# Altium PCB KNOCKLET_BRAC.PcbDoc
Units mm, origin at the board's own origin, x right, y up, seen from the top; angles counter-clockwise.
Board outline 80 x 80 mm, 4 copper layers (Top Layer, Internal Plane 1, Internal Plane 2, Bottom Layer), stack 0.462 mm thick; 43 components, 56 nets, 195 pads, 16 vias.
Unrouted connection lines stored in the file: 35.
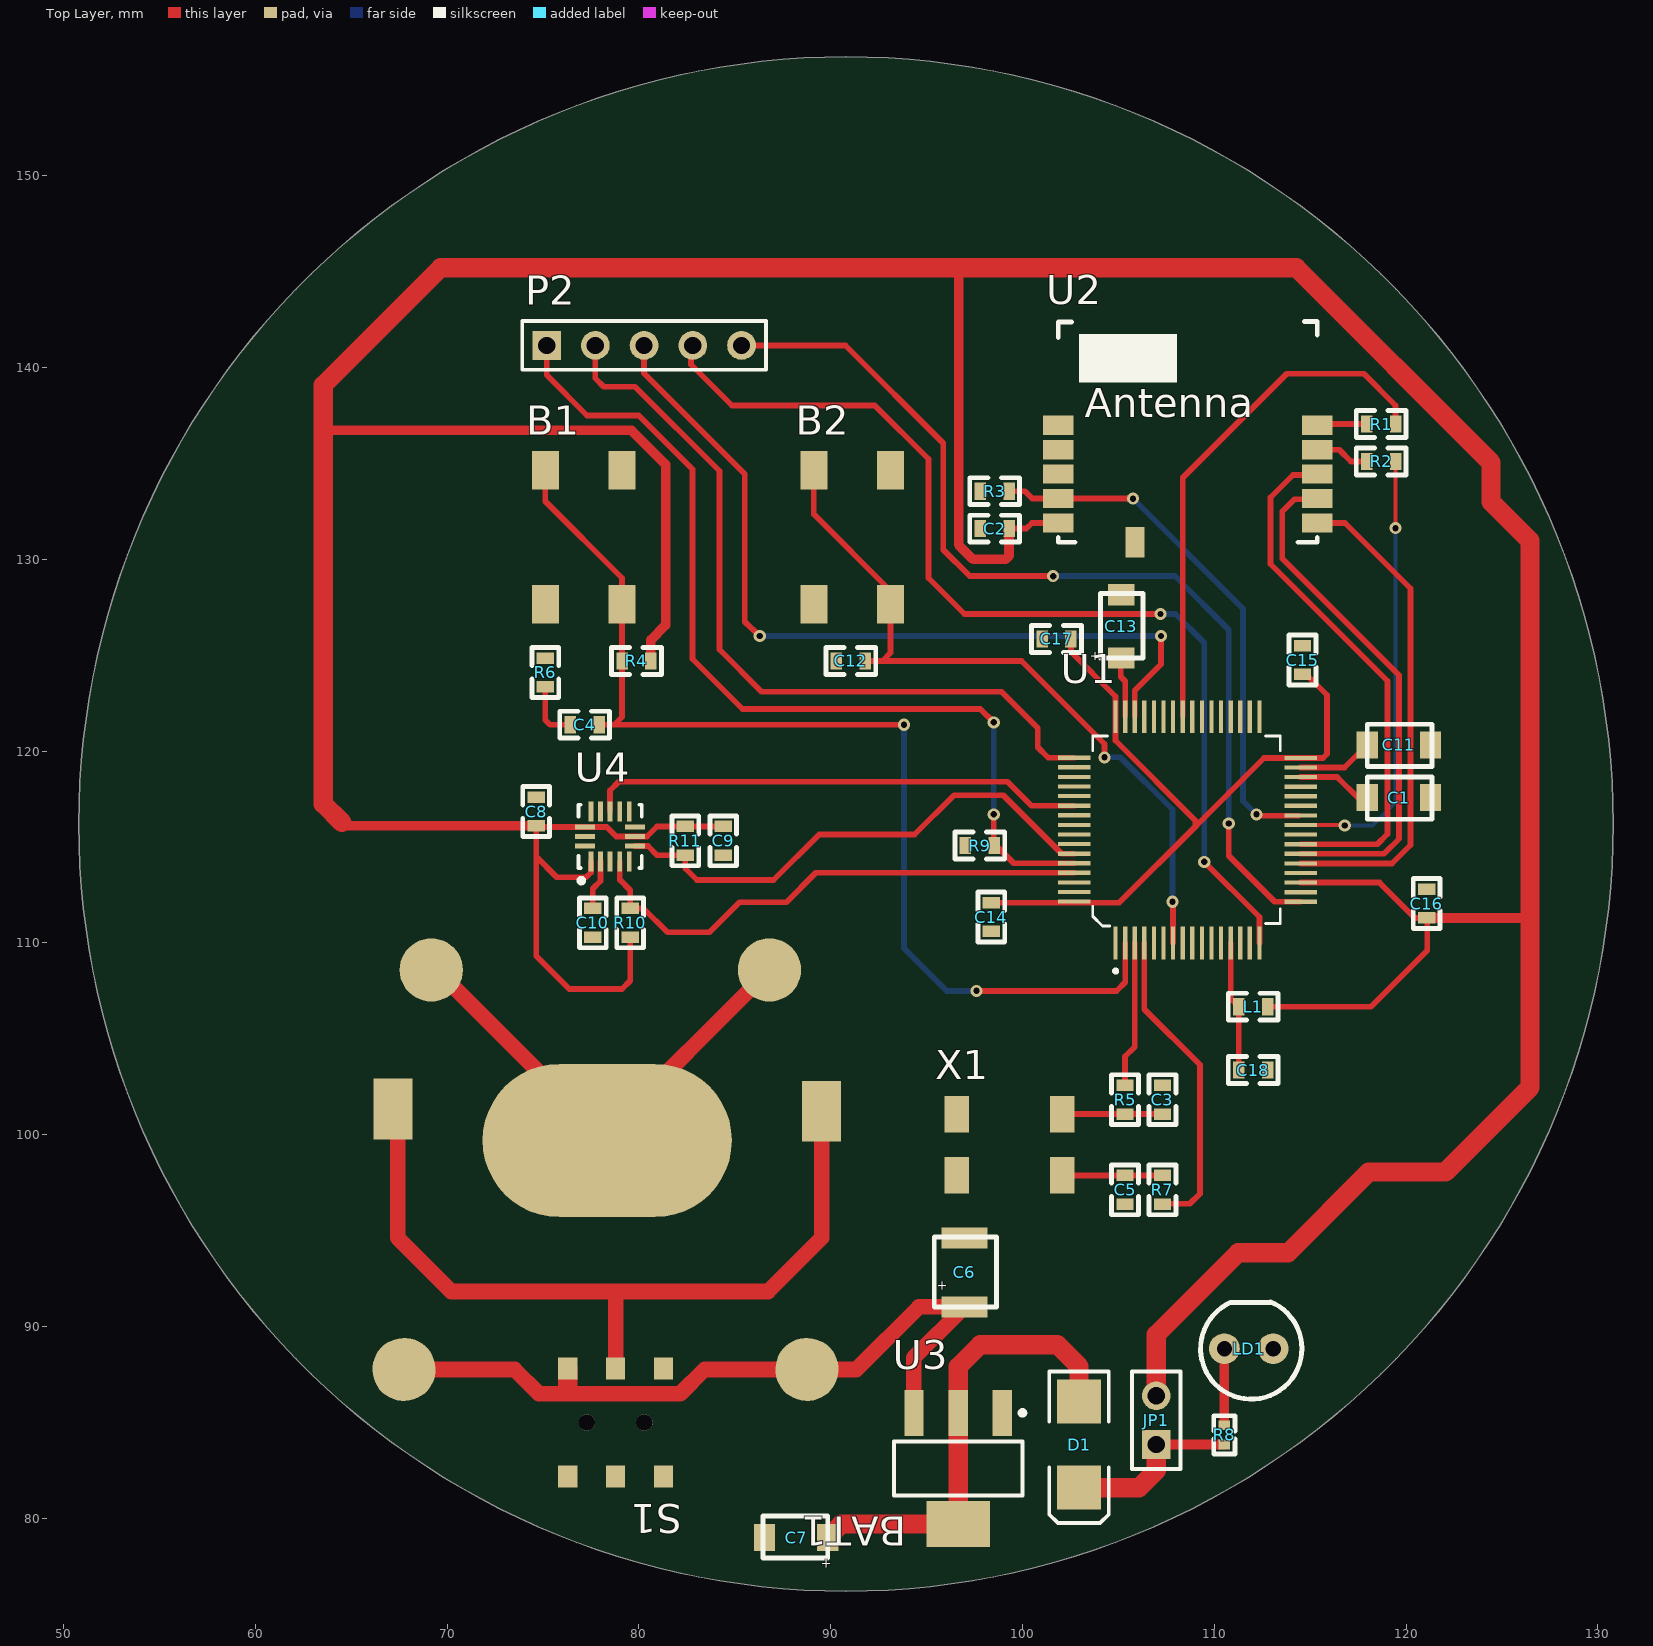
[diagram p0: Top Layer view]
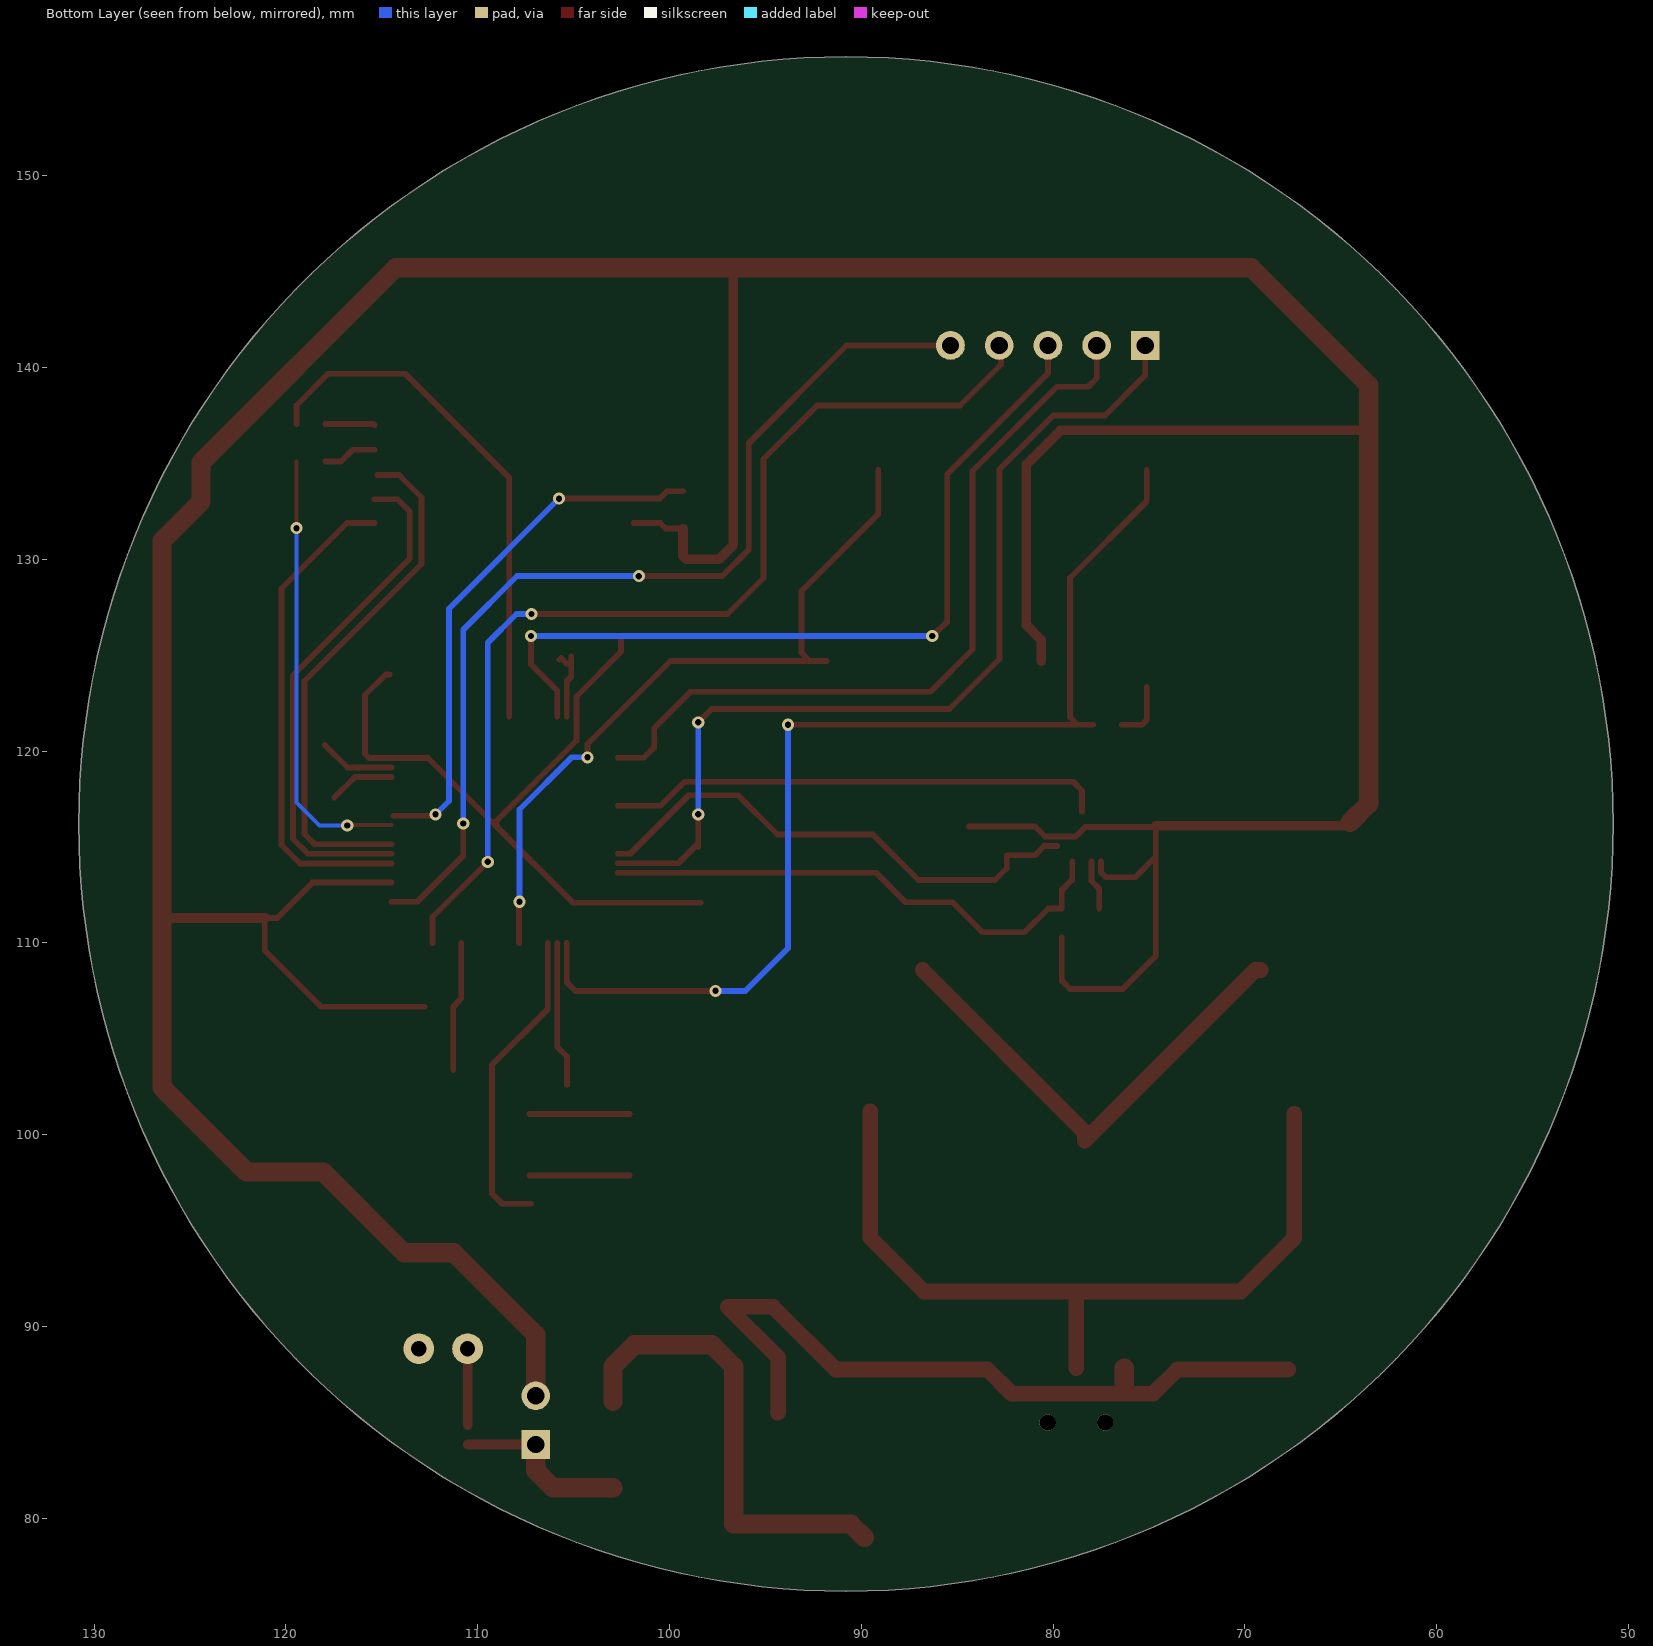
[diagram p1: Bottom Layer view, seen from below]
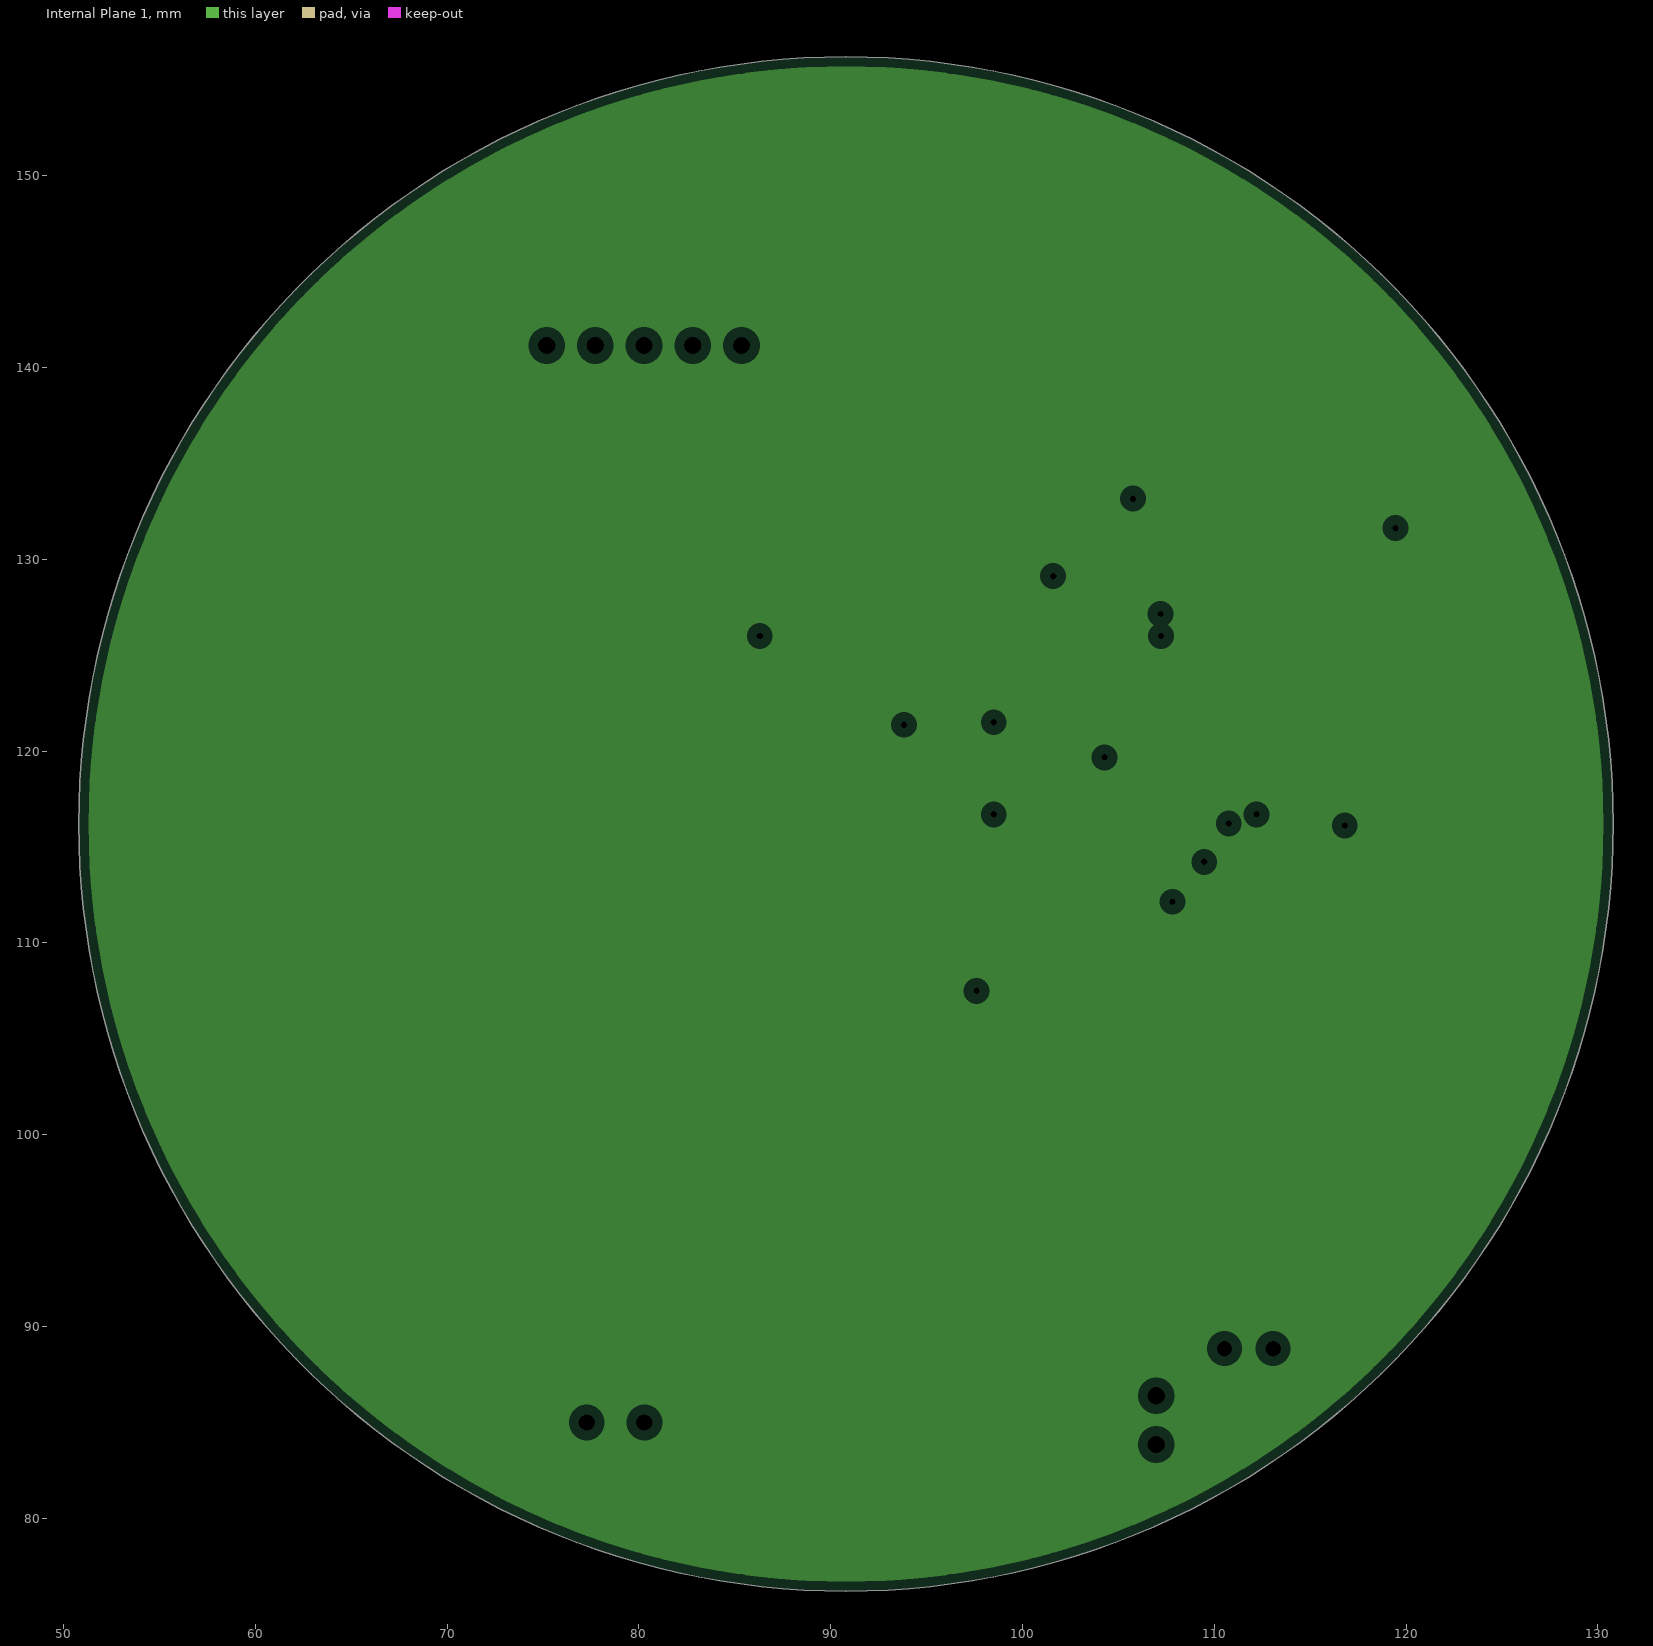
[diagram p2: Internal Plane 1, clearances drawn from the general rule]
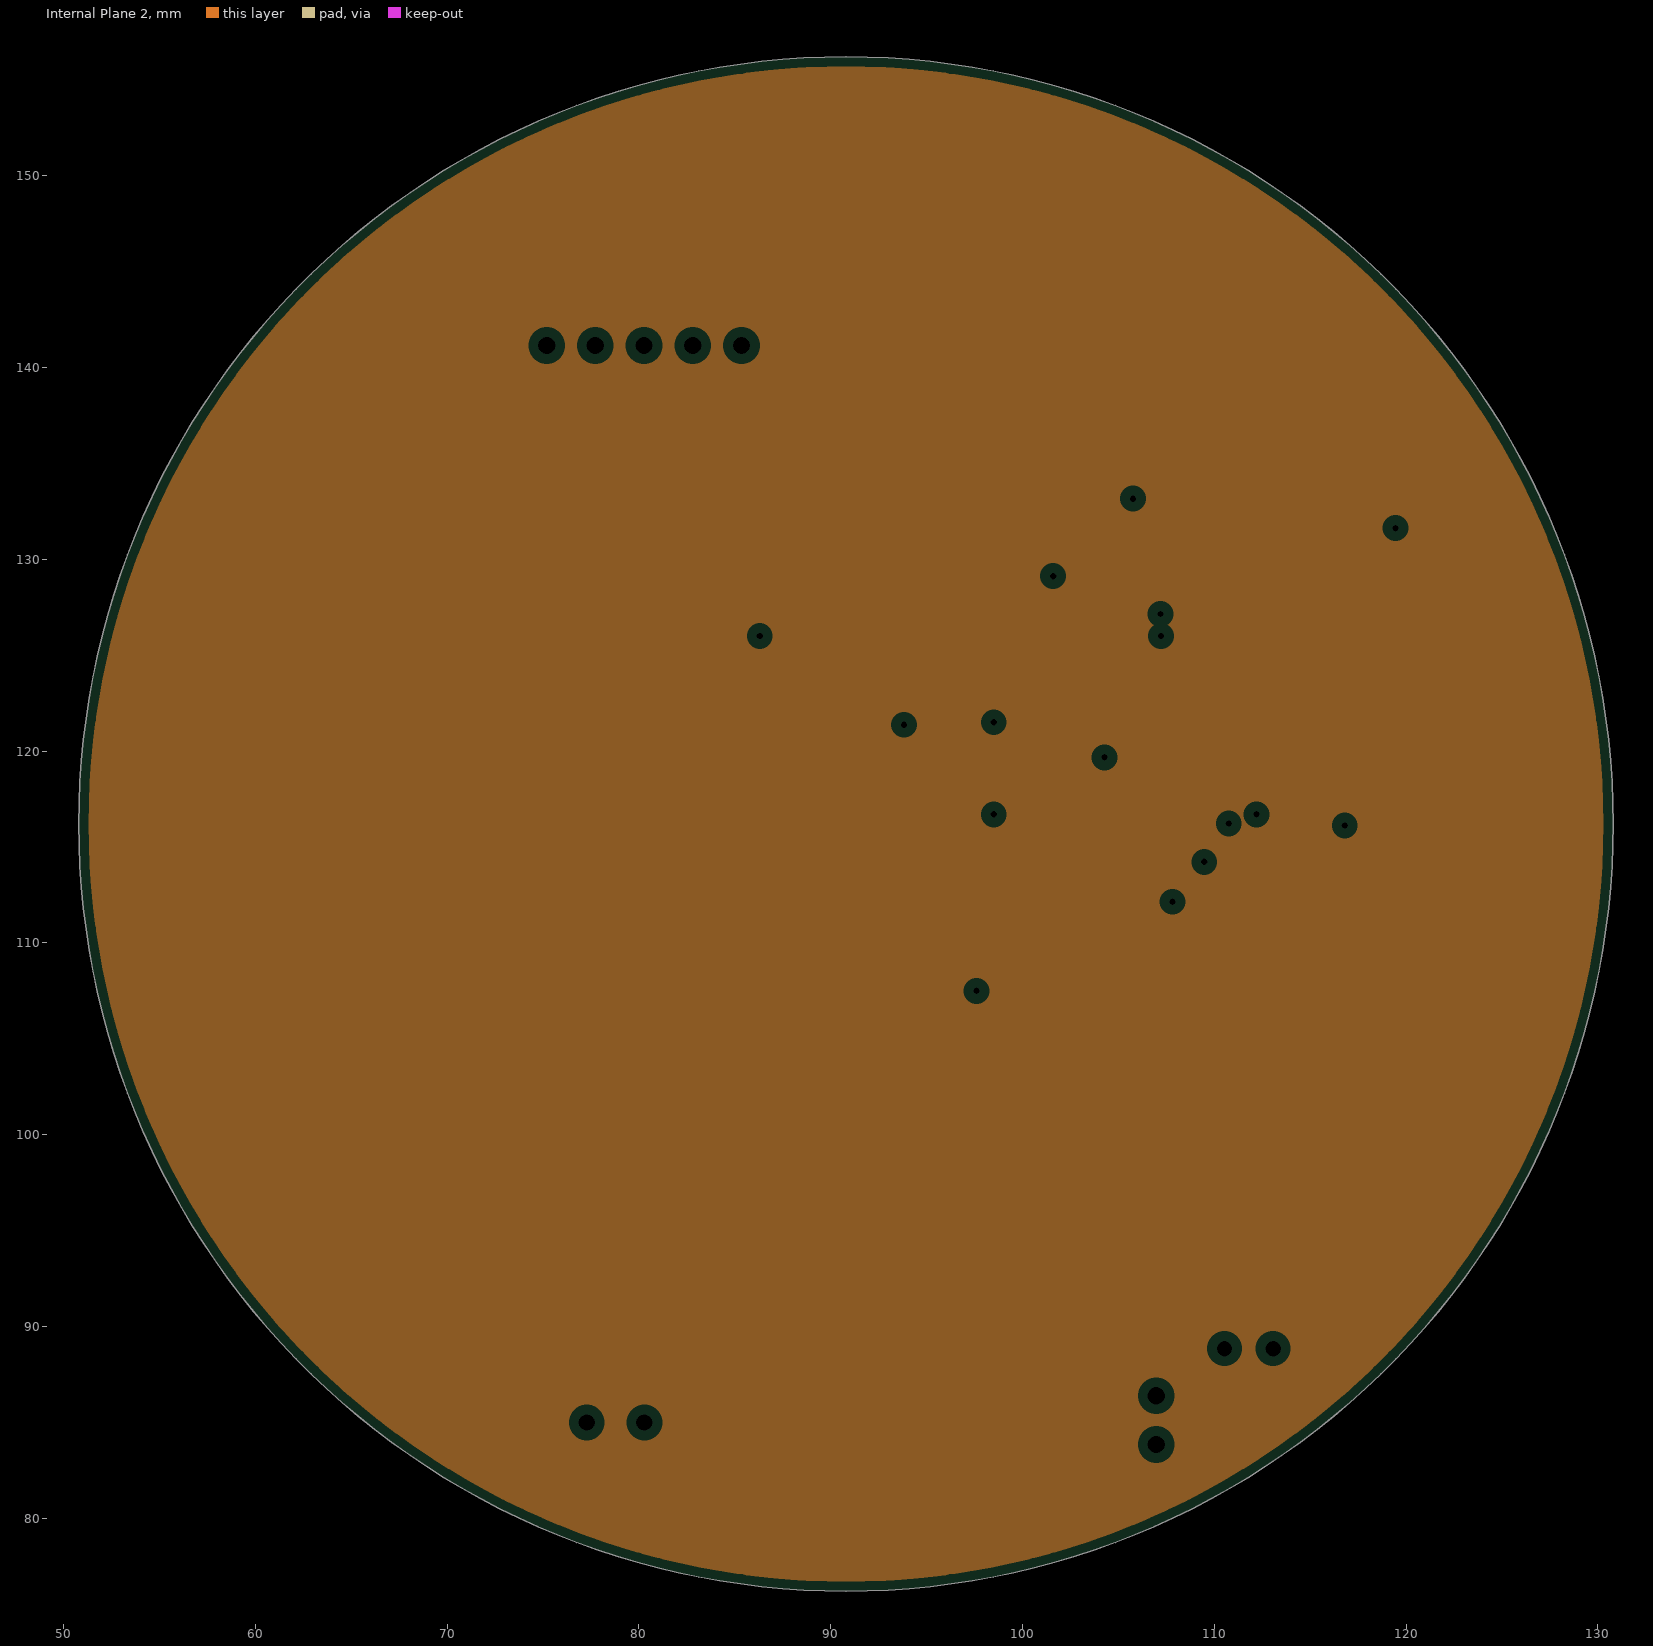
[diagram p3: Internal Plane 2, clearances drawn from the general rule]
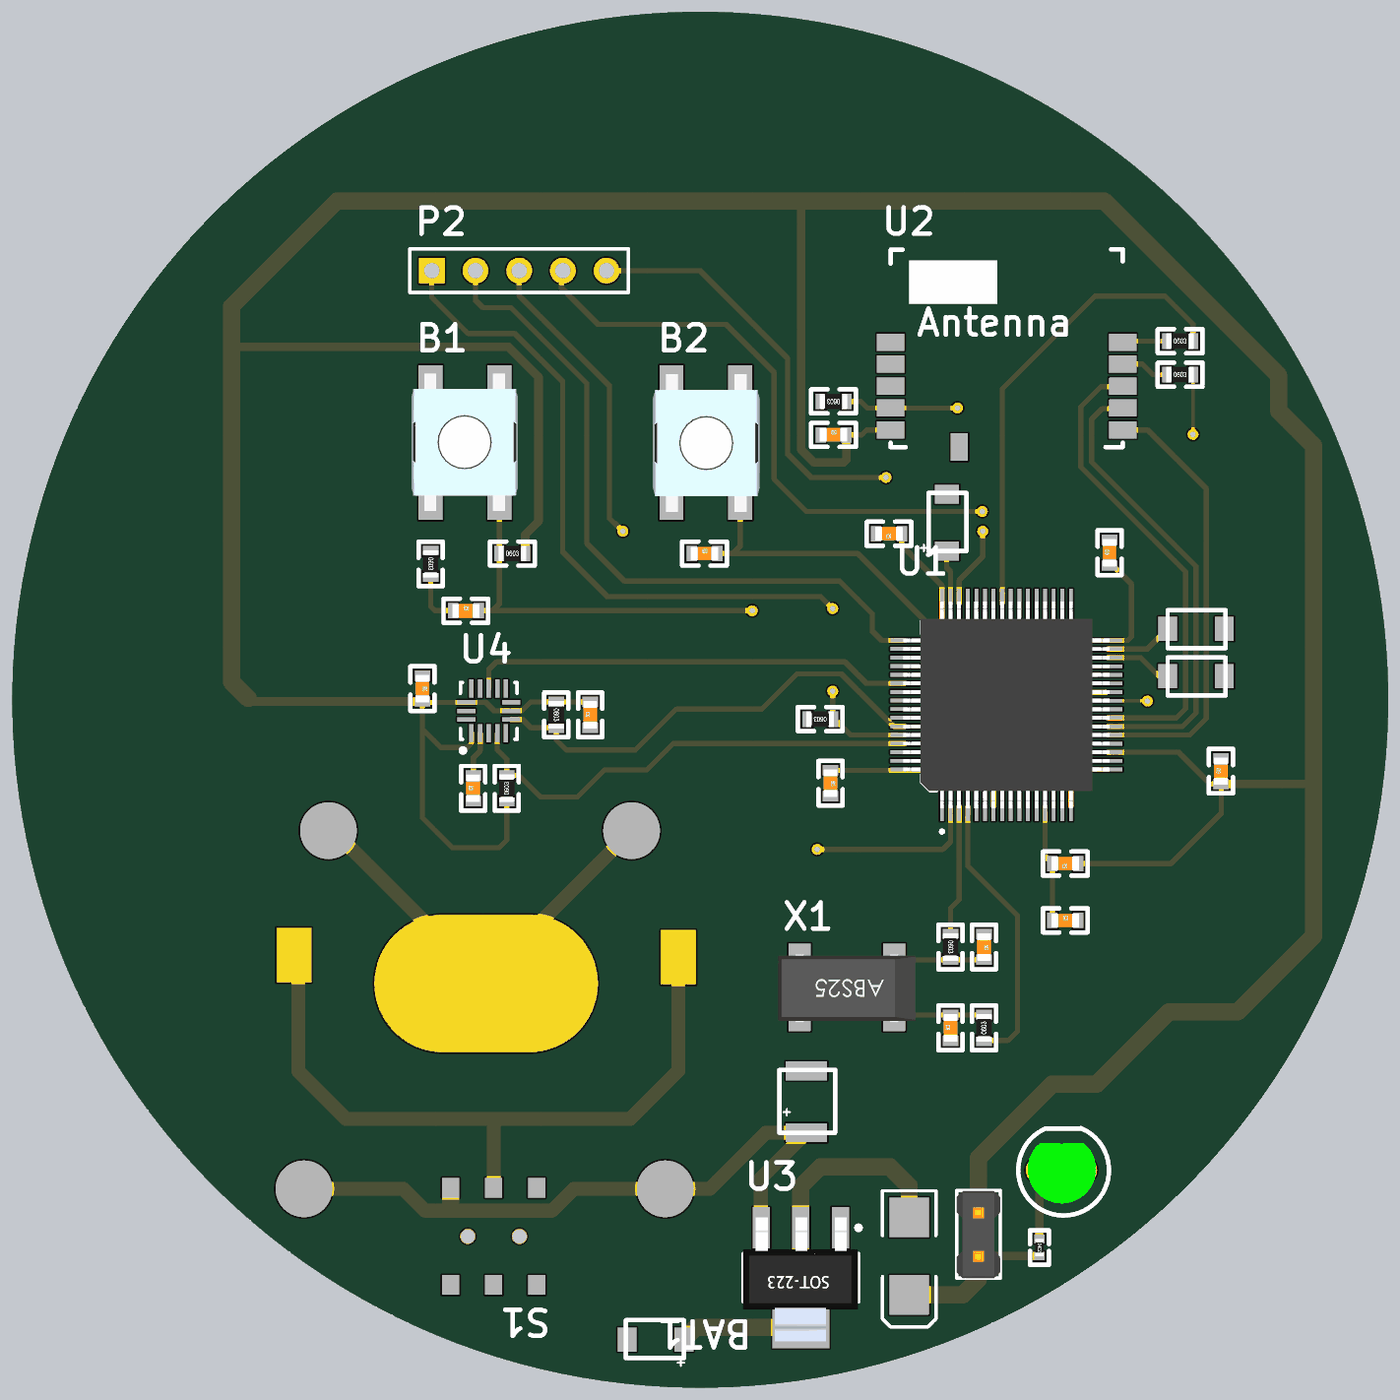
[diagram p4: 3D render of the assembled board from above, using the file's embedded part models]

## Layer stack, top to bottom
Top Solder: solder mask 0.0102, Solder Resist, Dk 3.5
Top Layer: signal copper 0.0356
Internal Plane 1: plane copper 0.0356
Internal Plane 2: plane copper 0.0356
Dielectric 1: dielectric 0.32, FR-4, Dk 4.8
Bottom Layer: signal copper 0.0356
Bottom Solder: solder mask 0.0102, Solder Resist, Dk 3.5

## Board outline
130.8,116.2 ccw(c90.8,116.2) 90.8,156.2 ccw(c90.8,116.2) 50.8,116.2 ccw(c90.8,116.2) 90.8,76.2 ccw(c90.8,116.2)

## Design rules (kind name [scope] priority, off if disabled: settings)
Clearance [All] p1: gap=0.3 ignorepadtopadclearanceinfootprint=FALSE
PlaneClearance [All] p1: clearance=0.508
PlaneConnect [All] p1: planeconnectstyle=Relief reliefexpansion=0.508 reliefentries=4 reliefconductorwidth=0.254 reliefairgap=0.254
PolygonConnect [All] p1: connectstyle=Relief reliefconductorwidth=0.254 reliefentries=4 polygonreliefangle="90 Angle" airgapwidth=0.254
RoutingVias [All] p1: holewidth=0.33 width=0.635 viastyle="Through Hole" minholewidth=0.203 minwidth=0.406 maxholewidth=0.711 maxwidth=1.27
SolderMaskExpansion [All] p1: expansion=0.102
UnRoutedNet [All] p1: checkbadconnections=TRUE
Width [All] p1: maxlimit=2.54 minlimit=0.2 preferedwidth=0.3 minimp=50.000000 maximp=50.000000 favimp=50.000000
27 further rules are at their usual default settings.

## Components (designator, comment, footprint, x,y, rotation, side; value= is the part's Value field where it differs from the comment)
B1 "USER (Blue)" SW_Wurth_430481035816 79.125,134.65 r270 top
B2 "TD-0341 [RESET/Black]" SW_Wurth_430481035816 89.125,127.65 r90 top
BAT1 "20mm coincell" BATT 78.35,99.7 r180 top
C1 "4.7uF" TAN-A 118.575,117.55 r0 top value=2.2uF
C2 "Cap" 0603[IMP]-CAP 97.8,131.6 r0 top value=1uF
C3 "Cap" 0603[IMP]-CAP 107.3,102.575 r270 top value=4.3pF
C4 "Cap" 0603[IMP]-CAP 76.425,121.375 r0 top value=100nF
C5 "Cap" 0603[IMP]-CAP 105.35,96.375 r90 top value=4.3pF
C6 "10uF(25V)" TAN-B 97,92.9 r90 top value=10uF
C7 "10uF" TAN-A 89.25,79.025 r180 top
C8 "Cap" 0603[IMP]-CAP 74.65,117.6 r270 top value=4.7uF
C9 "Cap" 0603[IMP]-CAP 84.4,114.575 r90 top value=0.1uF
C10 "Cap" 0603[IMP]-CAP 77.6,110.3 r90 top value=0.1uF
C11 "2.2uF" TAN-A 118.575,120.3 r0 top
C12 "Cap" 0603[IMP]-CAP 90.3,124.7 r0 top value=100nF
C13 "2.2uF" TAN-A 105.175,125.45 r90 top
C14 "Cap" 0603[IMP]-CAP 98.375,112.1 r270 top value=100nF
C15 "Cap" 0603[IMP]-CAP 114.6,124 r90 top value=100nF
C16 "Cap" 0603[IMP]-CAP 121.075,111.3 r90 top value=100nF
C17 "Cap" 0603[IMP]-CAP 102.525,125.85 r180 top value=100nF
C18 "Cap" 0603[IMP]-CAP 111.277,103.372 r0 top value=100nF
D1 "" SMB 102.95,83.85 r270 top
JP1 "" HDR1X2 106.975,83.85 r90 top
L1 "" 0603[IMP]-CAP 112.777,106.674 r180 top value=10mH
LD1 "Green" LED-1 111.8,88.85 r270 top
P2 "Header 5" HDR1X5 75.193,141.15 r0 top
R1 "Res1" 0603[IMP]-RES 117.95,137.05 r0 top value=10K
R2 "Res1" 0603[IMP]-RES 117.95,135.1 r0 top value=10K
R3 "Res1" 0603[IMP]-RES 99.3,133.55 r180 top value=47K
R4 "Res1" 0603[IMP]-RES 79.125,124.7 r0 top value=4K7
R5 "Res1" 0603[IMP]-RES 105.35,102.575 r270 top value=0
R6 "Res1" 0603[IMP]-RES 75.125,124.85 r270 top value=100
R7 "Res1" 0603[IMP]-RES 107.3,96.375 r90 top value=0
R8 "1K" 0402[IMP]-RES 110.525,84.85 r270 top
R9 "Res1" 0603[IMP]-RES 98.525,115.075 r180 top value=10K
R10 "Res1" 0603[IMP]-RES 79.55,110.3 r90 top value=10K
R11 "Res1" 0603[IMP]-RES 82.425,116.075 r270 top value=10K
S1 "SWITCH-SPDTSMD" AYZ0202 78.8,85 r180 top locked
U1 "MCU_LQFP64" LQFP64 108.6,115.9 r90 top
U2 "SPBTLE-RF" SPBTLE-RF 127.718,139.44 r0 top
U3 "LD1117S50TR" SOT223_N 96.65,82.598 r270 top
U4 "MMA8452QT" MMA8452QT 78.5,115.55 r90 top
X1 "32.768K[N/A]" Quartz_ABS25 102.076,97.879 r180 top

## Footprints (in the part's own frame and the unit in brackets; to place one, negate y for a bottom-side part, rotate by r counter-clockwise, add the part's x,y. Pads: shape width x height; smd on the part's side, far side on the other; paste and mask are expansions set on the pad)
0402[IMP]-RES [mm] "Chip Resistor, Body 2.0x1.2mm, IPC Medium Density"
  rect 0.5x0.6 smd: 1(0,0) 2(1,0)
  silkscreen extent -0.5,-0.55 1.5,0.55, body extent 0,-0.25 1,0.25, height 0.35
0603[IMP]-CAP [mm] "Chip Resistor, Body 2.0x1.2mm, IPC Medium Density"
  rect 0.6x0.9 smd: 1(0,0) 2(1.5,0)
  silkscreen extent -0.55,-0.7 2.05,0.7, body extent -0.05,-0.4 1.55,0.4, height 0.3
0603[IMP]-RES [mm] "Chip Resistor, Body 2.0x1.2mm, IPC Medium Density"
  rect 0.6x0.9 smd: 1(0,0) 2(1.5,0)
  silkscreen extent -0.55,-0.7 2.05,0.7, body extent -0.05,-0.45 1.55,0.45, height 0.5
AYZ0202 [mm]
  round 0.85 hole 0.85: 0(-1.489,0.002) 0(1.511,0.002)
  rect 1x1.15 smd: 1(2.511,-2.823) 2(0.011,-2.823) 3(-2.489,-2.823) 4(2.511,2.827) 5(0.011,2.827) 6(-2.489,2.827)
BATT [mil]
  round 129.91 smd: 1(-333,-350) 1(361,-350) 2(-410,470) 2(417,470)
  rrect100% 511.81x314.96 smd paste-255.91: 1(0,0)
  rect 80x125 smd paste-62.5: 2(-440,-60) 2(440,-65)
  Top Layer lines w10: 440,60 430,60
  Top Layer lines w32: 430,60 430,200 320,310 0,310 -17.28,310 -330,310 -440,200 ; 417,470 190,470 140,520 100,520 -150,520 -200,470 -410,470 ; 361,-350 350,-350 0,0 0,-17 -333,-350
  Top Layer lines w32.01: 430,60 430,-55 ; -440,200 -440,65 -440,-60
  body extent -583,-420 600,386, height 39
HDR1X2 [mm] "Connector; Header; 2 Position"
  rect 1.5x1.5 hole 0.9: 1(0,0)
  round 1.5 hole 0.9: 2(2.54,0)
  round 1.5 on Top Paste: 2(2.54,0)
  round 1.5 on Bottom Paste: 2(2.54,0)
  silkscreen extent -1.27,-1.27 3.81,1.27, body extent -1.29,-1.27 3.79,1.27, height 9.5
HDR1X5 [mm] "Connector; Header; 5 Position"
  rect 1.5x1.5 hole 0.9: 1(0,0)
  round 1.5 hole 0.9: 2(2.54,0) 3(5.08,0) 4(7.62,0) 5(10.16,0)
  silkscreen extent -1.27,-1.27 11.43,1.27
LED-1 [mm] "LED; 2 Leads"
  round 1.6 hole 0.8: 1(0,-1.27) 2(0,1.27)
  silkscreen extent -2.44,-2.51 2.64,2.77, body extent -1.55,-1.97 1.94,2.02, height 5.38
LQFP64 [mm]
  rect 1.7x0.22 smd: 1(-5.901,3.747) 2(-5.901,3.247) 3(-5.901,2.747) 4(-5.901,2.247) 5(-5.901,1.747) 6(-5.901,1.247) 7(-5.901,0.747) 8(-5.901,0.247) 9(-5.901,-0.253) 10(-5.901,-0.753) 11(-5.901,-1.253) 12(-5.901,-1.753) 13(-5.901,-2.253) 14(-5.901,-2.753) 15(-5.901,-3.253) 16(-5.901,-3.753) 33(5.902,-3.753) 34(5.902,-3.253) 35(5.902,-2.753) 36(5.902,-2.253) 37(5.902,-1.753) 38(5.902,-1.253) 39(5.902,-0.753) 40(5.902,-0.253) 41(5.902,0.247) 42(5.902,0.747) 43(5.902,1.247) 44(5.902,1.747) 45(5.902,2.247) 46(5.902,2.747) 47(5.902,3.247) 48(5.902,3.747)
  rect 0.22x1.7 smd: 17(-3.753,-5.901) 18(-3.253,-5.901) 19(-2.753,-5.901) 20(-2.253,-5.901) 21(-1.753,-5.901) 22(-1.253,-5.901) 23(-0.753,-5.901) 24(-0.253,-5.901) 25(0.247,-5.901) 26(0.747,-5.901) 27(1.247,-5.901) 28(1.747,-5.901) 29(2.247,-5.901) 30(2.747,-5.901) 31(3.247,-5.901) 32(3.747,-5.901) 49(3.754,5.902) 50(3.254,5.902) 51(2.754,5.902) 52(2.254,5.902) 53(1.754,5.902) 54(1.254,5.902) 55(0.754,5.902) 56(0.254,5.902) 57(-0.246,5.902) 58(-0.746,5.902) 59(-1.246,5.902) 60(-1.746,5.902) 61(-2.246,5.902) 62(-2.746,5.902) 63(-3.246,5.902) 64(-3.746,5.902)
  silkscreen extent -7.42,-4.84 4.89,4.94, body extent -6,-6 6,6, height 1.56
MMA8452QT [mm] "QFN, 16-Leads, Body 3,00x3,00mm, Pitch 0,50mm, Thermal Pad 0,00x1,15mm, IPC Medium Density"
  rect 1.05x0.25 smd: 1(-1.3,1) 2(-1.3,0.5) 3(-1.3,0) 4(-1.3,-0.5) 5(-1.3,-1) 9(1.3,-1) 10(1.3,-0.5) 11(1.3,0) 12(1.3,0.5) 13(1.3,1)
  rect 0.25x1.05 smd: 6(-0.5,-1.3) 7(0,-1.3) 8(0.5,-1.3) 14(0.5,1.3) 15(0,1.3) 16(-0.5,1.3)
  silkscreen extent -2.42,-1.65 1.65,1.65, body extent -1.5,-1.5 1.5,1.5, height 1
Quartz_ABS25 [mm]
  rect 1.3x1.9 smd: 1(0,-3.2) 2(5.5,-3.2) 3(5.5,0) 4(0,0)
  body extent -1.25,-3.55 6.75,0.45, height 2.7
SMB [mm] "DO-214-AA/SMB; 2 C-Bend Leads; Body 5.3 x 3.6 mm, inc. leads (LxW)"
  rect 2.3x2.3 smd: 1(-2.25,0) 2(2.25,0)
  silkscreen extent -3.8,-1.55 4.1,1.55
SOT223_N [mm] "SOT223, 4-Leads, Body 6.5x3.5mm, Pitch 2.3mm, Lead Span 7mm, IPC Medium Density"
  rect 2.4x1 smd: 1(-2.9,2.3) 2(-2.9,0) 3(-2.9,-2.3)
  rect 2.4x3.3 smd: 4(2.9,0)
  silkscreen extent -3.02,-3.35 1.4,3.48, body extent -3.5,-3.37 3.7,3.33, height 1.85
SPBTLE-RF [mm] "Module BlueNRG"
  rect 1.6x1 smd: 1(-25.85,-2.45) 2(-25.85,-3.725) 3(-25.85,-5) 4(-25.85,-6.275) 5(-25.85,-7.55) 7(-12.35,-7.55) 8(-12.35,-6.275) 9(-12.35,-5) 10(-12.35,-3.725) 11(-12.35,-2.45)
  rect 1x1.6 smd: 6(-21.85,-8.55)
  silkscreen extent -25.85,-8.55 -12.35,2.95
SW_Wurth_430481035816 [mm]
  rect 2x1.4 smd: 1(0,0) 2(7,0) 3(0,-4) 4(7,-4)
  body extent -0.53,-5.12 7.47,1.07, height 3.5
TAN-A [mm]
  rect 1.1x1.4 smd: 1(-0.6,0.025) 2(2.7,0.025)
  silkscreen extent -0.6,-1.1 2.77,1.1
TAN-B [mm]
  rect 1.1x2.4 smd: 1(-1.875,0.025) 2(1.725,0.025)
  silkscreen extent -1.87,-1.65 1.77,1.6

## Part data
B1 B2: library part "SW PUSHBUTTON", "SE PUSHBUTTON"
BAT1: library part BATTERY20MM_4LEGS, "Battery Holders Various common sizes : AA, AAA, 18650 (PRT-12895), 20mm coin cell and 12mm coin cell. 20MM_4LEGS, BATT-10373", PROD_ID=BATT-10373
C1: library part Cap_2.2uF_X7R_10%_0805, "Capacitor,4.7uF,25V, X7R,10%,1206,YAGEO", Manuf_1=YAGEO, Manuf_Part_1=CC0805KKX7R7BB225, Order=CC0805KKX7R7BB225, Revision="July-2002: Re-released for DXP Platform."
C2 C3 C4 C5 C8 C9 C10 C12 C14 C15 C16 C17 C18: "Capacitor"
C6 C7: library part "Cap Pol1", "Polarized Capacitor (Radial)", Published=8-Jun-2000, Publisher="Altium Limited", Revision="July-2002: Re-released for DXP Platform."
C11 C13: library part Cap_2.2uF_X7R_10%_0805, "Capacitor,2.2uF,16V, X7R,10%,0805,YAGEO", Manuf_1=YAGEO, Manuf_Part_1=CC0805KKX7R7BB225, Order=CC0805KKX7R7BB225, Revision="July-2002: Re-released for DXP Platform."
D1: library part "D Schottky", "Schottky Diode", Code_JEDEC=DO-214-AA, LatestRevisionDate=17-Jul-2002, LatestRevisionNote="Re-released for DXP Platform.", PackageDescription="DO-214-AA/SMB; 2 C-Bend Leads; Body 5.3 x 3.6 mm, inc. leads (LxW)", PackageReference=SMB, Published=8-Jun-2000, Publisher="Altium Limited"
JP1: library part JP2
L1: library part Inductor, "Inductor", Code_IEC=1005, Code_JEITA=0402, LatestRevisionDate=29-May-2009, LatestRevisionNote="IPC-7351 Footprint Added.", PackageDescription="Chip Inductor", PackageReference=0402-A, Published=8-Jun-2000, Publisher="Altium Limited"
LD1: library part LED2, "Typical RED, GREEN, YELLOW, AMBER GaAs LED", Published=8-Jun-2000, Publisher="Altium Limited", Revision="July-2002: Re-released for DXP Platform."
P2: "Header, 5-Pin", LatestRevisionDate=17-Jul-2002, LatestRevisionNote="Re-released for DXP Platform.", Publisher="Altium Limited"
R1 R2 R3 R4 R5 R6 R7 R9 R10 R11: "Resistor", LatestRevisionDate=17-Jul-2002, LatestRevisionNote="Re-released for DXP Platform.", PackageDescription="Axial Device, Thru-Hole; 2 Leads; 0.3 in Pin Spacing", PackageReference=AXIAL-0.3, Published=8-Jun-2000, Publisher="Altium Limited"
R8: library part Res1, "Resistor", LatestRevisionDate=17-Jul-2002, LatestRevisionNote="Re-released for DXP Platform.", PackageDescription="Axial Device, Thru-Hole; 2 Leads; 0.3 in Pin Spacing", PackageReference=AXIAL-0.3, Published=8-Jun-2000, Publisher="Altium Limited"
S1: "SPDT Switch Simple slide switch, Spark Fun Electronics SKU : COM-00102 DPDT SMT slide switch, AYZ0202, SWCH-08179", PROD_ID=SWCH-08179, SF_ID=COM-00597
U2: "Module BlueNRG"
U3: library part LD1117
X1: library part MC306

## Via types
v1: diameter 0.635, hole 0.33, Top Layer to Bottom Layer, 16 vias

## Nets (pads, with @x,y where several pads share a name; then routed paths per layer and width w, separated by ;. In a path a pad name is that pad's centre, name@x,y a point inside that pad or via, vN(x,y) a via of type N, cw(c..) or ccw(c..) an arc to the next point about the centre after c; other vN are vias at no path point)
+3V3: D1.2 JP1.1 R8.2 | length 9.3
  Top Layer w0.5: JP1.1 R8.2
  Top Layer w1: D1.2 106.075,81.6 106.975,82.5 JP1.1
AVDD: C18.1 L1.2 U1.13 | length 6.8
  Top Layer w0.3: U1.13 110.853,107.098 L1.2 C18.1
BOOT0: P2.1 R9.1 U1.60 | length 49.2
  Top Layer w0.3: P2.1 75.193,139.607 77.3,137.5 80,137.5 82.8,134.7 82.8,124.8 85.4,122.2 97.8,122.2 v1(98.5,121.5) ; R9.1@98.5,115 v1(98.5,116.7) ; R9.1@98.525,115.175 99.546,114.154 U1.60
  Bottom Layer w0.3: v1(98.5,116.7) v1(98.5,121.5)
BYP: C10.2 U4.2 | length 2.6
  Top Layer w0.3: C10.2 77.6,112.825 78,113.225 U4.2
CLK: U1.21 U2.7 | length 25.8
  Top Layer w0.3: U1.21 119.272,114.147 120.225,115.1 120.225,128.475 116.81,131.89 U2.7
CSN: R2.2 U1.25 | length 23.2
  Top Layer w0.2: U1.25@114.5,116.15 116.775,116.15 v1(116.8,116.125) ; v1(119.45,131.625) R2.2
  Bottom Layer w0.2: v1(116.8,116.125) 118.25,116.125 119.45,117.325 v1(119.45,131.625)
GND: B1.1 B1.4 B2.1 B2.4 BAT1.1 C1.2 C2.1 C3.1 C5.1 C6.2 C7.2 C8.1 C9.1 C10.1 C11.2 C12.1 C13.2 C14.2 C15.2 C16.2 C17.2 C18.2 LD1.2 R3.2 R6.1 R9.2 U1.12 U1.18 U1.63 U2.6 U3.1 U4.5 U4.10 U4.12
INT1: U1.54 U4.11 | length 26
  Top Layer w0.3: U4.11 78.5,117.95 78.95,118.4 99.225,118.4 100.471,117.154 U1.54
INT2: U4.9
LD1: LD1.1 R8.1 | length 4
  Top Layer w0.5: R8.1 110.525,88.845 LD1.1
MISO: U1.22 U2.8 | length 27.1
  Top Layer w0.3: U1.22 118.847,114.647 119.625,115.425 119.625,123.95 113.55,130.025 113.55,132.5 114.175,133.125 U2.8@115.4,133.125
MOSI: U1.23 U2.9 | length 27.6
  Top Layer w0.3: U1.23 118.497,115.147 119.025,115.675 119.025,123.65 112.925,129.75 112.925,133.225 114.1,134.4 U2.9@115.225,134.4
NetC3_2: C3.2 R5.2 X1.1 | length 5.3
  Top Layer w0.3: X1.1 105.296,101.079 R5.2@105.3,101.075 ; R5.2@105.25,101.075 R5.2@105.3,101.075 ; C3.2@107.296,101.079 C3.2 R5.2 R5.2@105.3,101.075
NetC4_1: C4.1 R6.2 | length 3.1
  Top Layer w0.3: R6.2 75.125,121.625 75.375,121.375 C4.1
NetC5_2: C5.2 R7.2 X1.4 | length 5.2
  Top Layer w0.3: X1.4@102.075,97.875 105.3,97.875 C5.2 R7.2 R7.2@107.296,97.879
NetR1_1: R1.1 U2.11 | length 2.6
  Top Layer w0.3: U2.11 115.428,137.05 R1.1
NetR2_1: R2.1 U2.10 | length 2.8
  Top Layer w0.3: U2.10 116.51,135.715 117.125,135.1 R2.1
NRST: B2.2 B2.3 C12.2 U1.7 | length 38.3
  Top Layer w0.3: B2.2 89.125,132.35 93.125,128.35 B2.3 93.125,125.125 92.7,124.7 ; C12.2 92.7,124.7 ; v1(104.275,119.675) 104.275,120.275 ; 104.275,120.325 104.275,120.375 99.95,124.7 92.7,124.7 ; U1.7 v1@107.853,112.147
  Bottom Layer w0.3: v1(104.275,119.675) 105.1,119.675 107.825,116.95 v1(107.825,112.15)
PA4: U1.20
PA9: U1.42
PA11: U1.44
PA12: U1.45
PA15: U1.50
PB2: U1.28
PB4: U1.56
PB5: U1.57
PB6: U1.58
PB10: U1.29
PB11: C1.1 U1.30 | length 3.4
  Top Layer w0.3: U1.30 116.403,118.647 ; 116.449,118.601 C1.1@117.475,117.575
PC0: U1.8
PC1: U1.9
PC3: U1.11
PC4: U1.24
PC6: U1.37
PC7: U1.38
PC8: U1.39
PC9: U1.40
PC10: U1.51
PC11: U1.52
PC12: U1.53
PC13: B1.2 B1.3 C4.2 R4.1 U1.2 | length 57.3
  Top Layer w0.3: B1.3 75.125,133.025 79.125,129.025 B1.2 R4.1 79.125,121.775 78.725,121.375 ; C4.2 78.725,121.375 ; v1(93.825,121.375) 78.725,121.375 ; v1(97.6,107.5) 104.9,107.5 105.353,107.953 U1.2
  Bottom Layer w0.3: v1(93.825,121.375) 93.825,109.725 96.05,107.5 v1(97.6,107.5)
PC14: R5.1 U1.3 | length 7.6
  Top Layer w0.3: R5.1@105.35,102.6 105.35,104.075 105.853,104.578 U1.3
PC15: R7.1 U1.4 | length 16.5
  Top Layer w0.3: U1.4 106.353,106.547 109.25,103.65 109.25,96.925 108.725,96.4 R7.1@107.225,96.4
RESETN: R1.2 U1.41 | length 27.5
  Top Layer w0.3: U1.41 108.353,134.253 113.775,139.675 117.8,139.675 119.45,138.025 R1.2
SCL: R10.2 U1.61 U4.4 | length 27.6
  Top Layer w0.3: U4.4 79,113.275 79.025,113.275 79.55,112.75 R10.2 80.25,111.8 81.496,110.553 83.679,110.553 85.25,112.125 87.7,112.125 89.229,113.654 U1.61
SDA: R11.2 U1.59 U4.6 | length 27.1
  Top Layer w0.3: U4.6 80.475,115.05 80.95,114.575 R11.2 82.425,113.875 83.025,113.275 87.025,113.275 89.4,115.65 94.375,115.65 96.425,117.7 99,117.7 102.046,114.654 U1.59
SPI_IRQ: R3.1 U1.26 U2.4 | length 28
  Top Layer w0.3: R3.1 100.125,133.55 100.51,133.165 U2.4 v1(105.76,133.165) ; v1(112.2,116.7) 112.275,116.625 U1.26@114.4,116.625
  Bottom Layer w0.3: v1(105.76,133.165) 111.5,127.425 111.5,117.4 v1(112.2,116.7)
SWCLK: P2.2 U1.49 | length 40.8
  Top Layer w0.3: P2.2 77.733,139.433 78.166,139 79.8,139 84.2,134.6 84.2,125.3 86.4,123.1 98.9,123.1 100.8,121.2 100.8,120.2 101.3,119.7 ; 101.346,119.654 U1.49
SWDIO: P2.3 U1.46 | length 43.3
  Top Layer w0.3: P2.3 80.273,139.702 85.525,134.45 85.525,126.75 v1(86.3,126) ; U1.46 105.853,123.153 107.225,124.525 v1@107.225,125.975
  Bottom Layer w0.3: v1(86.3,126) v1(107.225,126)
USART_RX: P2.5 U1.17 | length 51.3
  Top Layer w0.3: P2.5 90.775,141.15 95.875,136.05 95.875,130.5 97.25,129.125 v1(101.6,129.125) ; v1(110.75,116.225) 110.75,114.55 113.153,112.147 U1.17
  Bottom Layer w0.3: v1(101.6,129.125) 107.95,129.125 110.75,126.325 v1(110.75,116.225)
USART_TX: P2.4 U1.16 | length 54.3
  Top Layer w0.3: P2.4@82.725,141.25 82.725,140.15 84.85,138.025 92.3,138.025 95.1,135.225 95.1,129.025 96.975,127.15 v1(107.2,127.15) ; v1(109.475,114.225) 112.353,111.347 U1.16
  Bottom Layer w0.3: v1(107.2,127.15) 107.975,127.15 109.475,125.65 v1(109.475,114.225)
VCAP1: C11.1 U1.31 | length 4
  Top Layer w0.3: U1.31 116.797,119.147 C11.1
VCAP2: C13.1 U1.47 | length 3.8
  Top Layer w0.3: C13.1@105.125,124.95 105.125,123.875 105.353,123.647 U1.47 ; C13.1@105.353,124.553 105.4,124.6 105.65,124.85 C13.1@105.74,124.76
VDD: C2.2 C8.2 C9.2 C14.1 C15.1 C16.1 C17.1 JP1.2@106.975,86.39 L1.1 R4.2 R10.1 R11.1 U1.19 U1.32 U1.48 U1.64 U2.5 U4.1 U4.7 U4.14 | length 303.9
  Top Layer w0.3: U4.1 77.5,113.675 77.25,113.425 75.725,113.425 74.65,114.5 ; R10.1 79.55,108.025 79.125,107.6 76.375,107.6 74.65,109.325 74.65,114.5 ; C9.2 R11.1 80.95,116.075 80.425,115.55 U4.7 78.825,115.55 78.325,116.05 U4.14 74.7,116.05 C8.2 74.65,114.5 ; C14.1 105.05,112.1 109.037,116.088 ; C2.2 100.2,131.6 100.49,131.89 U2.5 ; C17.1@102.525,125.825 102.525,125.175 104.853,122.847 U1.48 104.853,120.547 109.025,116.375 109.025,116.175 109.05,116.15 ; 109.075,116.125 112.597,119.647 U1.32 115.672,119.647 115.875,119.85 115.875,122.925 114.8,124 C15.1 ; L1.1 118.174,106.674 121.1,109.6 C16.1@121.1,111.275 ; U1.19 118.622,113.147 ; 118.625,113.125 120.45,111.3 C16.1
  Top Layer w0.5: 63.55,136.725 79.625,136.725 81.4,134.95 81.4,126.575 80.625,125.8 R4.2 ; 64.475,116.05 64.525,116.1 C8.2 ; 96.675,145.2 96.675,130.75 97.425,130 99.125,130 99.3,130.175 C2.2 ; C16.1 126.375,111.3 126.4,111.325
  Top Layer w1: 64.525,116.275 63.55,117.25 63.55,136.725 63.55,139.075 69.675,145.2 96.675,145.2 114.275,145.2 124.425,135.05 124.425,133 126.459,130.966 126.459,102.459 122.053,98.053 118.053,98.053 113.85,93.85 111.25,93.85 106.975,89.575 JP1.2@106.975,86.39
VIN: BAT1.2 C6.1 S1.1 S1.2 U3.3 | length 20.9
  Top Layer w0.813: S1.2 78.789,91.711 ; BAT1.2@88.764,87.762 91.337,87.762 94.6,91.025 C6.1 94.325,88.375 94.325,85.523 U3.3
  Top Layer w1: 76.289,86.971 S1.1
VOUT: C7.1 D1.1 U3.2 U3.4 | length 24.4
  Top Layer w1: C7.1 90.548,79.698 U3.4 U3.2 96.65,87.9 97.8,89.05 101.825,89.05 102.95,87.925 D1.1
pads on no net: JP1.2@106.975,86.39 S1.0 S1.3 S1.4 S1.5 S1.6 U1.1 U1.5 U1.6 U1.10 U1.14 U1.15 U1.27 U1.33 U1.34 U1.35 U1.36 U1.43 U1.55 U1.62 U2.1 U2.2 U2.3 U4.3 U4.8 U4.13 U4.15 U4.16 X1.2 X1.3

## Text inside footprints (layer, text, board x,y; h text height)
C6: Top Overlay "+" at 96.025,91.85 h0.5 r90
C7: Top Overlay "+" at 90.05,77.85 h0.5 r180
C13: Top Overlay "+" at 104,124.65 h0.5 r90
U2: Top Overlay "Antenna" at 103.243,137.415 h1.52